# Altium PCB PTW_ECU_CP_V1.0.PcbDoc
Units mm, origin at the board's own origin, x right, y up, seen from the top; angles counter-clockwise.
Board outline 16 x 29.3 mm, 2 copper layers (Top Layer, Bottom Layer), stack 0.771 mm thick; 29 components, 21 nets, 105 pads, 148 vias.
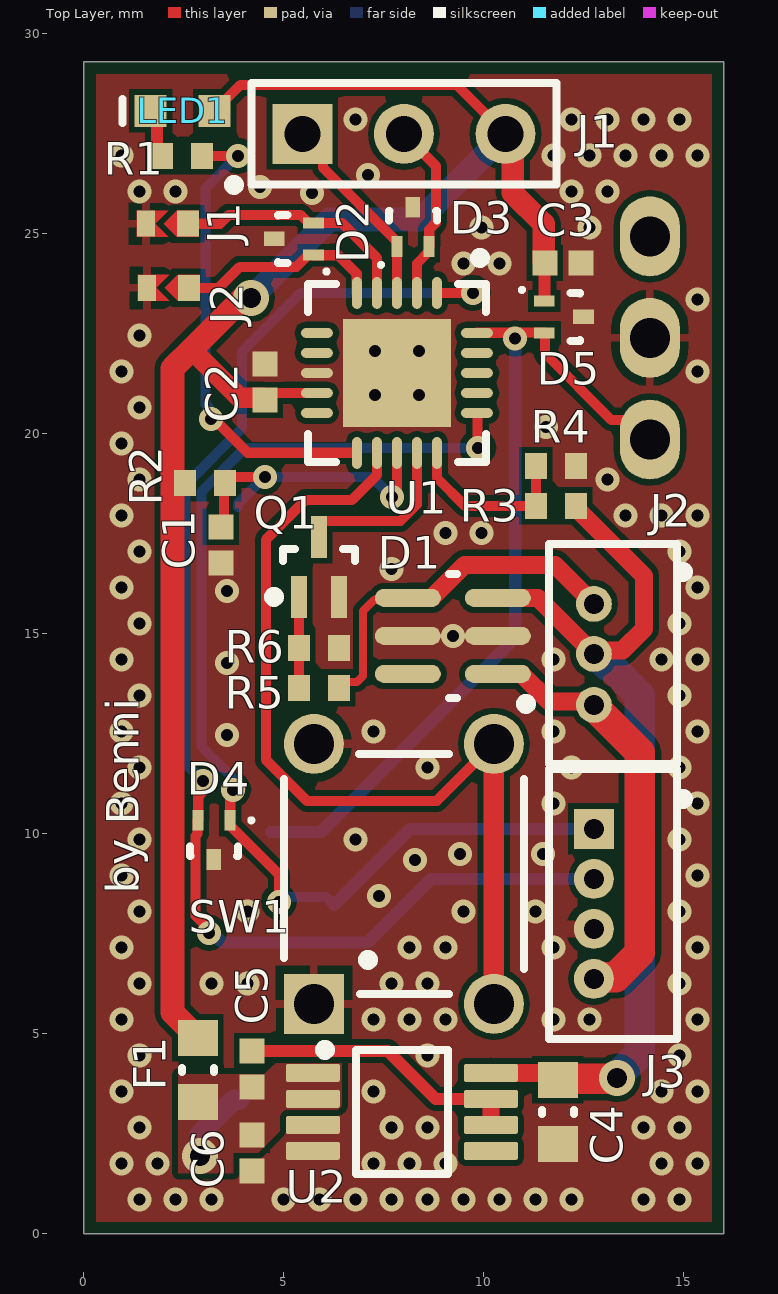
[diagram p0: Top Layer view]
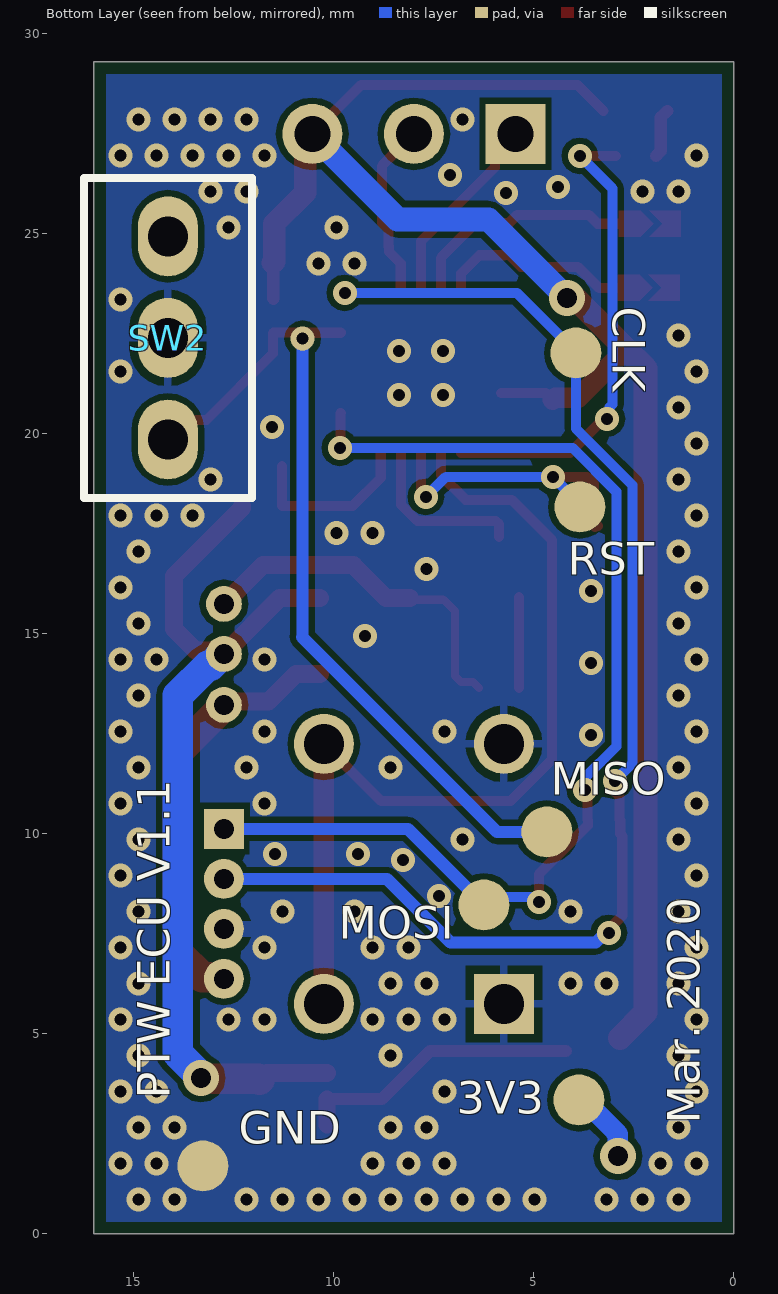
[diagram p1: Bottom Layer view, seen from below]

## Layer stack, top to bottom
Top Solder: solder mask 0.0102, Solder Resist, Dk 3.5
Top Layer: signal copper 0.0356
Dielectric 1: dielectric 0.7, FR-4, Dk 4.8
Bottom Layer: signal copper 0.0356
Bottom Solder: solder mask 0.0102, Solder Resist, Dk 3.5

## Board outline
0,0 16,0 16,29.3 0,29.3

## Design rules (kind name [scope] priority, off if disabled: settings)
BoardOutlineClearance [All] p1: gap=0.3 ignorepadtopadclearanceinfootprint=FALSE
Clearance [All] p1: gap=0.15 ignorepadtopadclearanceinfootprint=FALSE
ComponentClearance [All] p1: gap=0 collisioncheckmode=3 verticalgap=0 showdistances=FALSE
HoleSize [All] p1: absolutevalues=TRUE maxlimit=2.54 minlimit=0.3 maxpercent=80.000 minpercent=20.000
HoleToHoleClearance [All] p1: gap=0.45 allowstackedmicrovias=TRUE
MinimumSolderMaskSliver [All] p1: minsoldermaskwidth=0.051
PlaneConnect [All] p1: planeconnectstyle=Direct reliefexpansion=0.508 reliefentries=4 reliefconductorwidth=0.254 reliefairgap=0.254
PolygonConnect PolygonConnect_Jumper [InNet('GND') vs HasFootprint('Jmp0402(1005)_N')] p1: connectstyle=Relief reliefconductorwidth=0.203 reliefentries=4 polygonreliefangle="90 Angle" airgapwidth=0.203
PolygonConnect PolygonConnect_SW1 [InNet('GND') vs HasFootprint('OMRON B3F-1006')] p2: connectstyle=Relief reliefconductorwidth=0.203 reliefentries=4 polygonreliefangle="90 Angle" airgapwidth=0.203
PolygonConnect PolygonConnect_J3 [InNet('GND') vs HasFootprint('530470410')] p3: connectstyle=Relief reliefconductorwidth=0.406 reliefentries=4 polygonreliefangle="90 Angle" airgapwidth=0.203
PolygonConnect PolygonConnect_SW2 [InNet('GND') vs HasFootprint('D2A-1120')] p4: connectstyle=Relief reliefconductorwidth=0.203 reliefentries=4 polygonreliefangle="90 Angle" airgapwidth=0.203
PolygonConnect [All] p5: connectstyle=Direct reliefconductorwidth=0.254 reliefentries=4 polygonreliefangle="90 Angle" airgapwidth=0.254
RoutingVias [All] p1: holewidth=0.3 width=0.6 viastyle="Through Hole" minholewidth=0.3 minwidth=0.6 maxholewidth=5.08 maxwidth=63.5
SilkToSilkClearance [All] p1: silktosilkclearance=0.076
SilkToSolderMaskClearance [IsPad] p1: minsilkscreentomaskgap=0.051 clearancetoexposedcopper=TRUE
SolderMaskExpansion [All] p1: expansion=0.051
Width [All] p1: maxlimit=1.524 minlimit=0.15 preferedwidth=0.254
23 further rules are at their usual default settings.

## Classes and differential pairs
component class uC: C1 C2 C3 C4 C5 D1 D2 D3 D4 D5 F1 J1 J2 J3 LED1 Q1 R1 R2 R3 R4 R5 R6 SW1 SW2 U1 U2

## Components (designator, comment, footprint, x,y, rotation, side; value= is the part's Value field where it differs from the comment)
C1 "100nF 25V 0402" CAPC0402(1005)60_N 3.425,17.225 r90 top value=10nF
C2 "100nF 25V 0402" CAPC0402(1005)60_N 4.525,21.3 r270 top value=10nF
C3 "100nF 25V 0402" CAPC0402(1005)60_N 11.975,24.275 r180 top value=10nF
C4 "CAP 4.7µF 25V 0603" CAPC0603(1608)100_N 11.85,3.05 r90 top value=180pF
C5 "680pF 25V 0402" CAPC0402(1005)60_N 4.2,4.125 r270 top value=10nF
C6 "CAP 4.7µF 6.3V 0402" CAPC0402(1005)60_N 4.2,2.025 r90 top value=10nF
D1 "PESD24VS4UD,115" NXP-SOT457_N 9.225,14.95 r180 top
D2 "UESD3.3DT5G" ONSC-SOT-723-3-631AA-01_V 5.25,24.875 r180 top
D3 "UESD3.3DT5G" ONSC-SOT-723-3-631AA-01_V 8.225,25.175 r90 top
D4 "UESD3.3DT5G" ONSC-SOT-723-3-631AA-01_V 3.25,9.85 r270 top
D5 "UESD3.3DT5G" ONSC-SOT-723-3-631AA-01_V 12,22.925 r0 top
F1 "0ZCM0008FF2G" RESC0603(1608)_N 2.85,4.1 r90 top value="232.00 Ohm"
J1 "Jmp0402" Jmp0402(1005)_N 2.1,25.254 r180 top
J1 "801-43-003-10-001000" 801-43-003-10-001000 5.46,27.5 r0 top locked
J2 "Jmp0402" Jmp0402(1005)_N 2.125,23.65 r180 top
J2 "0530470310" 530470310 13.225,14.5 r90 top locked
J3 "0530470410" 530470410 12.75,8.25 r90 top locked
LED1 "150060SS75000" 0603_A 2.467,28.075 r0 top
Q1 "2N7002BKT,115" NXP-SOT416_B_N 5.875,16.675 r90 top
R1 "10k 1% 0402" RESC0402(1005)_N 2.45,26.95 r0 top value="10000.00 Ohm"
R2 "10k 1% 0402" RESC0402(1005)_N 3.025,18.775 r0 top value="10000.00 Ohm"
R3 "590k 0.1% 0402" RESC0402(1005)_N 11.8,18.2 r0 top value="470.00 Ohm"
R4 "110k 0.1% 0402" RESC0402(1005)_N 11.8,19.2 r180 top value="470.00 Ohm"
R5 "3k 1% 0402" RESC0402(1005)_N 5.875,13.65 r0 top value="470.00 Ohm"
R6 "10k 1% 0402" RESC0402(1005)_N 5.875,14.65 r180 top value="470.00 Ohm"
SW1 "B3F-1006" "OMRON B3F-1006" 8,9 r90 top locked
SW2 "D2A-1120" D2A-1120 14.15,22.4 r90 bottom locked
U1 "ATtiny84A-MUR" 20M1_N 7.825,21.525 r270 top
U2 "LP2951ACMM-3.3" DGK0008A_N 7.95,3.05 r0 top

## Footprints (in the part's own frame and the unit in brackets; to place one, negate y for a bottom-side part, rotate by r counter-clockwise, add the part's x,y. Pads: shape width x height; smd on the part's side, far side on the other; paste and mask are expansions set on the pad)
20M1_N [mm] "QFN, 20-Leads, Body 4x4mm, Pitch 0.5mm, Thermal Pad 2.7x2.7mm, IPC Medium Density"
  oval 0.8x0.25 smd: 1(-2,1) 2(-2,0.5) 3(-2,0) 4(-2,-0.5) 5(-2,-1) 11(2,-1) 12(2,-0.5) 13(2,0) 14(2,0.5) 15(2,1)
  oval 0.25x0.8 smd: 6(-1,-2) 7(-0.5,-2) 8(0,-2) 9(0.5,-2) 10(1,-2) 16(1,2) 17(0.5,2) 18(0,2) 19(-0.5,2) 20(-1,2)
  rect 2.7x2.7 smd: 21(0,0)
  silkscreen extent -3,-2.22 2.23,2.23, body extent -2.07,-2.07 2.08,2.08, height 0.8
0603_A [mm] "Chip LED, 2-Leads, Body 1.6x0.8mm, IPC Medium Density"
  rect 0.8x0.8 smd: 1(-0.8,0) 2(0.8,0)
  silkscreen extent -1.5,-0.3 -1.5,0.3, body extent -0.8,-0.4 0.8,0.4, height 0.7
801-43-003-10-001000 [mm] "Connector; Header; 3 Position"
  rect 1.5x1.5 hole 0.9 paste+0.051: 1(0,0)
  round 1.5 hole 0.9 paste+0.051: 2(2.54,0) 3(5.08,0)
  silkscreen extent -1.83,-1.4 6.35,1.27, body extent -1.31,-1.28 6.31,1.26, height 7.01
530470310 [mm] "CONN HEADER 3POS 1.25MM VERT TIN"
  round 0.9 hole 0.5 paste+0.051: 1(1.25,0.475) 2(0,0.475) 3(-1.275,0.475)
  silkscreen extent -2.75,-1.88 2.75,1.6, body extent -2.75,-1.6 2.75,1.6, height 4.25
530470410 [mm] "THD, 4-Leads, Body 5.5x3.2mm, Pitch 1.25mm"
  rect 1x1 hole 0.5 paste+0.051: 1(1.875,0)
  round 1 hole 0.5 paste+0.051: 2(0.625,0) 3(-0.625,0) 4(-1.875,0)
  silkscreen extent -3.37,-2.35 3.38,1.12, body extent -3.37,-2.07 3.38,1.13, height 4.18
CAPC0402(1005)60_N [mm] "Chip Capacitor, Body 1.0x0.5mm, Height 0.6mm, IPC Medium Density"
  rect 0.62x0.62 smd: 1(-0.45,0) 2(0.45,0)
  body extent -0.55,-0.3 0.55,0.3, height 0.6
CAPC0603(1608)100_N [mm] "Chip Capacitor, Body 1.6x0.8mm, Height 1.0mm, IPC Medium Density"
  rect 0.9x1 smd: 1(-0.8,0) 2(0.8,0)
  silkscreen extent -0.05,-0.4 0.05,0.4, body extent -0.87,-0.48 0.88,0.47, height 1
D2A-1120 [mm] "THT tactile switch"
  oval 2x1.5 hole 1 paste+0.051: 1(0,0) 2(2.54,0) 3(-2.54,0)
  silkscreen extent -4,-2.1 4,2.1, body extent -3.99,-2.8 7.01,2.8, height 8
DGK0008A_N [mm] "TSOP, 8-Leads, Body 3.1x3.1mm, Pitch 0.65mm, IPC Medium Density"
  rrect22% 1.35x0.45 smd paste+0.051 mask+0.051: 1(-2.225,0.975) 2(-2.225,0.325) 3(-2.225,-0.325) 4(-2.225,-0.975) 5(2.225,-0.975) 6(2.225,-0.325) 7(2.225,0.325) 8(2.225,0.975)
  silkscreen extent -2.05,-1.55 1.15,1.67, body extent -2.45,-1.5 2.45,1.5, height 0.94
Jmp0402(1005)_N [mm] "Jumper, Body 1.0x0.5mm, IPC Medium Density"
  rect 0.55x0.65 smd paste-1: 1(-0.5,0)
  rect 0.45x0.65 smd paste-1: 2(0.55,0)
  Top Layer region: 0.312,0 -0.013,-0.325 0.775,-0.325 0.775,0.325 -0.013,0.325
  Top Layer region: -0.775,-0.325 -0.225,-0.325 0.1,0 -0.225,0.325 -0.775,0.325
  Top Layer region: -0.062,-0.162
  Top Layer region: -0.225,-0.325
NXP-SOT416_B_N [mm] "SOT23, 3-Leads, Body 1.6x0.8mm, Pitch 0.5mm, IPC Medium Density"
  rect 1.05x0.4 smd paste+0.051: 1(-0.75,0.5) 2(-0.75,-0.5) 3(0.75,0)
  silkscreen extent -0.87,-0.9 0.45,1.25, body extent -0.45,-0.9 0.45,0.9, height 0.95
NXP-SOT457_N [mm] "SOP, 6-Leads, Body 3.1x1.7mm, Pitch 0.95mm, IPC Medium Density"
  oval 1.65x0.45 smd: 1(-1.125,0.95) 2(-1.125,0) 3(-1.125,-0.95) 4(1.125,-0.95) 5(1.125,0) 6(1.125,0.95)
  Top Layer region: -1.651,0
  silkscreen extent -1.95,-1.55 0.1,1.82, body extent -1.38,-1.5 1.39,1.5, height 0.94
"OMRON B3F-1006" [mm] "TH, 4-Leads, Body 6x6mm"
  rect 1.5x1.5 hole 1 paste+0.051: 1(-3.25,2.25)
  round 1.5 hole 1 paste+0.051: 2(3.25,2.25) 3(-3.25,-2.25) 4(3.25,-2.25)
  silkscreen extent -3,-3 3,3, body extent -3.85,-3 3.85,3, height 4.3
ONSC-SOT-723-3-631AA-01_V [mm] "SOT223, 3-Leads, Body 1.2x0.8mm, Pitch 0.4mm"
  rect 0.52x0.27 smd: 1(-0.49,0.4) 2(-0.49,-0.4)
  rect 0.52x0.36 smd: 3(0.49,0)
  silkscreen extent -0.86,-0.6 0.4,0.87, body extent -0.4,-0.6 0.4,0.6, height 0.55
RESC0402(1005)_N [mm] "Chip Resistor, Body 1.0x0.5mm, IPC Medium Density"
  rect 0.55x0.65 smd: 1(-0.5,0) 2(0.5,0)
  body extent -0.52,-0.27 0.53,0.28, height 0.4
RESC0603(1608)_N [mm] "Chip Resistor, Body 1.6x0.8mm, IPC Medium Density"
  rect 0.9x1 smd: 1(-0.8,0) 2(0.8,0)
  silkscreen extent -0.05,-0.4 0.05,0.4, body extent -0.85,-0.47 0.85,0.47, height 0.6

## Part data
C1 C2 C3: library part CMP-1034-01880-1, "CAP 100nF 25V ±10% 0402 (1005 Metric) Thickness 0.6mm SMD", Case-EIA=0402, Case-Metric=1005, Rated Voltage="25 V", Tolerance=±10%, Max Thickness="0.6 mm", Technology=SMT
C4: library part CMP-1035-01407-1, "CAP 4.7µF 25V ±2% 0603 (1608 Metric) Thickness 1mm SMD", Case-EIA=0603, Case-Metric=1608, Rated Voltage="16 V", Tolerance=±2%, Max Thickness="1 mm", Technology=SMT
C5: library part CMP-1034-01880-1, "CAP 680pF 25V ±10% 0402 (1005 Metric) Thickness 0.6mm SMD", Case-EIA=0402, Case-Metric=1005, Rated Voltage="25 V", Tolerance=±10%, Max Thickness="0.6 mm", Technology=SMT
C6: library part CMP-1034-01880-1, "CAP 4.7µF 6.3V ±10% 0402 (1005 Metric) Thickness 0.6mm SMD", Case-EIA=0402, Case-Metric=1005, Rated Voltage="25 V", Tolerance=±10%, Max Thickness="0.6 mm", Technology=SMT
D1: "TVS Diodes / ESD Suppressors 24V - 4-fold unidirectional ESD protection array"
D2 D3 D4 D5: library part CMP-1063-00209-1, "ESD Protection Diode, 3-Pin SOT-723, Pb-Free, Tape and Reel", Manufacturer="On Semiconductor", ComponentLink1Description="Manufacturer URL", ComponentLink1URL=http://www.onsemi.com/, ComponentLink2Description=Datasheet, ComponentLink2URL=http://www.onsemi.cn/pub_link/Collateral/UESD3.3DT5G-D.PDF, ComponentLink3Description="Package Specification", ComponentLink3URL=http://www.onsemi.com/pub_link/Collateral/631AA.PDF, DatasheetVersion="Rev. 4", Direction=Unidirectional, IR Max (uA)=1, Mounting Technology="Surface Mount", Number of Lines=2, PackageDescription="3-Pin Small Outline Transistor, Body 1.2 x 0.8 mm, Pitch 0.4 mm", PackageReference=SOT-723-3-631AA-01, PackageVersion="Rev. D, 08/2009", Packing="Tape and Reel", PartNumber=UESD3.3DT5G, RoHS=Pb-Free, V(BR) Min (V)=5, VRWM Max (V)=3.3
F1: library part CMP-1012-00436-1, "PTC 80mA 15V 0603 Trip: 200mA", Case-EIA=0603, Case-Metric=1608, Power="0.1 W", Tolerance="1 %", Technology=SMT
J1 J2: "Jumper 0402 with 150µm space"
J1: "3 Pim header socket 7mm height", ComponentLink1Description=Datasheet, ComponentLink1URL=https://www.mill-max.com/products/socket/801-xx-xxx-10-001000/801-43-003-10-001000?s_term=801-43-003-10-001000&s_type=Quick%2FProduct%2FPart+Number+Search
J2: "Molex Picoblade, 3Pin THT Straight", Supplier Part Number 1=538-53047-0310, ComponentLink1Description=Datasheet, ComponentLink1URL=http://www.molex.com/pdm_docs/sd/530470310_sd.pdf, Supplier 1=Mouser, Supplier 2=Digi-Key, Supplier Part Number 2=WM1732-ND
J3: "Molex Picoblade, 4Pin THT Straight", ComponentLink1Description=Datasheet, ComponentLink1URL=http://www.molex.com/pdm_docs/sd/530470410_sd.pdf
LED1: library part CMP-1426-00004-1, "SMD mono-color Chip LED, WL-SMCW, Super Red", Color="Super Red", Manufacturer="Wuerth Elektronik", ComponentLink1Description="Manufacturer URL", ComponentLink1URL=http://www.we-online.com, ComponentLink2Description=Datasheet, ComponentLink2URL=http://katalog.we-online.com/led/datasheet/150060SS75000.pdf, PackageReference=0603_A, PartNumber=150060SS75000
Q1: library part CMP-1259-00271-1, "N-Channel Trench MOSFET, 60 V, 0.29 A, -55 to 150 degC, 3-Pin SOT416, Tape and Reel", Manufacturer="NXP Semiconductors", Automotive Qualified=Y, Channel Type=N, Code_JEITA=SC-75, ComponentLink1Description="Manufacturer URL", ComponentLink1URL=http://www.nxp.com/, ComponentLink2Description=Datasheet, ComponentLink2URL=http://www.nxp.com/documents/data_sheet/2N7002BKT.pdf, ComponentLink3Description="Package Specification", ComponentLink3URL=http://www.nxp.com/documents/data_sheet/2N7002PT.pdf, DatasheetVersion="Rev. 1", ID [max] (A)=0.29, IDM [max] (A)=1.2, Mounting Technology="Surface Mount", PackageDescription="3-Pin Small Outline Transistor Package, Body 1.6 x 0.8 mm, Pitch 0.5 mm", PackageReference=SOT416_B, PackageVersion="06-03-16, 03/2006", Packing="Tape & Reel", PartNumber=2N7002BKT,115, VDS [max] (V)=60, VGSth [typ] (V)=1.6
R1 R2: library part CMP-1011-00623-1, "10K 0.063W 1% 0402 (1005 Metric)  SMD", Case-EIA=0402, Case-Metric=1005, Power="0.063 W", Tolerance="1 %", Technology=SMT
R3: library part CMP-1011-00473-1, "590k 0.063W 1% 0402 (1005 Metric)  SMD", Case-EIA=0402, Case-Metric=1005, Power="0.063 W", Tolerance="1 %", Technology=SMT
R4: library part CMP-1011-00473-1, "110k 0.063W 1% 0402 (1005 Metric)  SMD", Case-EIA=0402, Case-Metric=1005, Power="0.063 W", Tolerance="1 %", Technology=SMT
R5: library part CMP-1011-00473-1, "3k 0.063W 1% 0402 (1005 Metric)  SMD", Case-EIA=0402, Case-Metric=1005, Power="0.063 W", Tolerance="1 %", Technology=SMT
R6: library part CMP-1011-00473-1, "10k 0.063W 1% 0402 (1005 Metric)  SMD", Case-EIA=0402, Case-Metric=1005, Power="0.063 W", Tolerance="1 %", Technology=SMT
SW1: "Tactile Switch Omron B3F-1006", Contact Resistance=50mOhm, ComponentLink1Description=Datasheet, ComponentLink1URL=https://omronfs.omron.com/en_US/ecb/products/pdf/en-b3f.pdf, Manufacture specification=B3F-1006, Travel=0.25mm
SW2: "SWITCH TACTILE Omron D2A 0.1A 30V", Contact resistence="50mO max.", Current Rating="0.1A @ 30VDC", Manufacturer=Omron, Manufacturer Part=MK-12C02-PB, Operating force=50gf±1gf, Operating Temperature="-10°C ~ 80°C", Actuator Type=Standard, ComponentLink1Description="Manufacturer URL", ComponentLink1URL=http://components.omron.eu/, ComponentLink2Description=Datasheet, ComponentLink2URL=https://omronfs.omron.com/en_US/ecb/products/pdf/en-d2a.pdf, Insulation="100MO min.", Mounting Type="Through Hole", Switch Function=On-On
U1: library part CMP-0093-00271-1, "8-bit AVR Microcontroller,  20MHz, 1.8-5.5V, 8KB Flash, 512 Bytes EEPROM, 512 Bytes SRAM, 20-pin MLF, Industrial Grade (-40°C to 85°C), Pb-Free, Reel", Code_JEDEC=MO-220WGGD-5, ComponentLink1Description="Manufacturer URL", ComponentLink1URL=http://www.atmel.com/, ComponentLink2Description="ATtiny24A/44A/84A Datasheet", ComponentLink2URL=http://www.atmel.com/dyn/resources/prod_documents/doc8183.pdf, ComponentLink3Description="ATtiny24A/44A/84A Summary", ComponentLink3URL=http://www.atmel.com/dyn/resources/prod_documents/8183S.pdf, DatasheetVersion="revD, Apr-2011", PackageDescription="20-pad, 4 x 4 x 0.8 mm Body, Lead Pitch 0.50 mm, 2.6 mm Exposed Pad, Micro Lead Frame Package (MLF)", PackageReference=20M1, PackageVersion="revA, Oct-2004", PartId=1
U2: library part CMP-0062-02229-3, "Series of Adjustable Micropower Voltage Regulators, 8-pin Mini SOIC", Manufacturer="Texas Instruments", PackageTopMarking=ZXTT*L0CA, PowerWise=N, Code_JEDEC=MO-187-AA, ComponentLink1Description="Datasheet URL", ComponentLink1URL=http://www.ti.com/general/docs/lit/getliterature.tsp?genericPartNumber=LP2951-N&fileType=pdf, CompType="LDO IC", PackageDescription="MINI SOIC, .118 x .118 x .034in, 8 Lead, .0256in Pitch", PackageReference=DGK0008A, PinCount=8, RoHS=N

## Free pads (board coordinates)
  round 1.27 smd far side paste+0.051: 2(3.85,18.175) 2(3.875,3.35) 2(3.95,22.025) 2(4.675,10.05) 2(6.25,8.225) 2(13.275,1.7)

## Via types
v1: diameter 0.6, hole 0.3, Top Layer to Bottom Layer, tented both sides, 145 vias
v2: diameter 0.9, hole 0.5, Top Layer to Bottom Layer, tented both sides, 3 vias

## Nets (pads, with @x,y where several pads share a name; then routed paths per layer and width w, separated by ;. In a path a pad name is that pad's centre, name@x,y a point inside that pad or via, vN(x,y) a via of type N, cw(c..) or ccw(c..) an arc to the next point about the centre after c; other vN are vias at no path point)
3V3: C5.2 C6.2 F1.1 pad.2@3.875,3.35 U2.1 U2.2 | length 1.9
  Bottom Layer w0.508: v2(2.9,1.95) 2.9,2.498 3.102,2.7 3.752,3.35 pad.2@3.875,3.35
21V: C4.2 D1.3 J2.2@12.75,14.5 R3.2 U2.8 | length 22.9
  Top Layer w0.457: U2.8 10.179,4.021 11.679,4.021 C4.2 ; D1.3 10.354,15.896 11.354,15.896 12.75,14.5 12.835,14.585 13.46,14.585 14,15.125 14,16.45 12.3,18.15 R3.2
  Top Layer w0.762: C4.2 11.875,3.875 13.3,3.875 v2(13.325,3.9)
  Bottom Layer w0.762: J2.2@12.75,14.5 12.787,14.5 13.081,14.206 13.156,14.206 13.9,13.462 13.9,4.512 13.325,3.937 v2(13.325,3.9)
Auto_Jumper: D2.1 J2.1@2.625,23.65 U1.5 | length 5.2
  Top Layer w0.254: J2.1@2.625,23.65 3.375,23.65 3.9,24.175 5.315,24.175 5.615,24.475 D2.1 5.748,24.467 6.358,24.467 6.823,24.002 6.823,23.527 U1.5
Battery: R3.1 R4.2 U1.15 | length 4.4
  Top Layer w0.254: U1.15 8.827,19.523 8.827,18.898 9.525,18.2 R3.1 R4.2
FA_signal: D1.4 J2.1@12.75,15.75 R5.2 | length 9
  Top Layer w0.203: R5.2 6.525,13.8 6.823,13.8 6.975,13.952 6.975,15.575 7.25,15.85 7.275,15.85 7.278,15.853 8.053,15.853 D1.4
  Top Layer w0.457: D1.4 8.693,15.9 9.518,16.725 11.775,16.725 J2.1@12.75,15.75
FA_signal_µC: Q1.3 U1.14 | length 4.3
  Top Layer w0.254: Q1.3 5.875,17.75 5.948,17.823 7.914,17.823 8.325,18.234 U1.14
GND: C1.1 C2.1 C3.1 C4.1 C6.1 D1.2 D1.5 D2.3 D3.3 D4.3 D5.3 J1.2@1.55,25.254 J2.2@1.575,23.65 J3.3 pad.2@13.275,1.7 Q1.2 R4.1 R6.1 SW1.1 SW1.2 SW2.1 U1.8 U1.21 U2.3 U2.4
  other v1: 1.39,0.86 2.29,0.86 3.19,0.86 4.99,0.86 5.89,0.86 6.79,0.86 7.69,0.86 8.59,0.86 9.49,0.86 10.39,0.86 11.29,0.86 12.19,0.86 13.99,0.86 14.89,0.86 0.94,1.76 1.84,1.76 7.24,1.76 8.14,1.76 9.04,1.76 14.44,1.76 15.34,1.76 1.39,2.66 7.69,2.66 8.59,2.66 13.99,2.66 14.89,2.66 0.94,3.56 7.24,3.56 14.44,3.56 15.34,3.56 1.39,4.46 8.59,4.46 14.89,4.46 0.94,5.36 7.24,5.36 8.14,5.36 9.04,5.36 11.74,5.36 12.64,5.36 15.34,5.36 1.39,6.26 3.19,6.26 4.09,6.26 7.69,6.26 8.59,6.26 14.89,6.26 0.94,7.16 8.14,7.16 9.04,7.16 11.74,7.16 15.34,7.16 1.39,8.06 4.09,8.06 9.49,8.06 11.29,8.06 14.89,8.06 7.376,8.45 0.94,8.96 15.34,8.96 8.275,9.35 9.4,9.5 11.475,9.5 1.39,9.86 6.79,9.86 14.89,9.86 0.94,10.76 11.74,10.76 15.34,10.76 1.39,11.66 8.59,11.66 12.19,11.66 14.89,11.66 3.575,12.475 0.94,12.56 7.24,12.56 11.74,12.56 15.34,12.56 1.39,13.46 14.89,13.46 3.575,14.275 0.94,14.36 11.74,14.36 14.44,14.36 15.34,14.36 9.225,14.95 1.39,15.26 14.89,15.26 3.575,16.075 0.94,16.16 15.34,16.16 7.69,16.625 1.39,17.06 14.89,17.06 9.04,17.525 9.94,17.525 0.94,17.96 13.54,17.96 14.44,17.96 15.34,17.96 1.39,18.86 13.09,18.86 0.94,19.76 11.55,20.175 1.39,20.66 7.275,20.975 8.375,20.975 0.94,21.56 15.34,21.56 7.275,22.075 8.375,22.075 1.39,22.46 15.34,23.36 9.49,24.26 10.39,24.26 9.94,25.16 12.64,25.16 5.7,26.025 1.39,26.06 2.29,26.06 12.19,26.06 13.09,26.06 4.4,26.175 7.1,26.475 0.94,26.96 11.74,26.96 12.64,26.96 13.54,26.96 14.44,26.96 15.34,26.96 6.79,27.86 12.19,27.86 13.09,27.86 13.99,27.86 14.89,27.86
LB_Input: D3.2 J1.2@8,27.5 U1.2 | length 4.5
  Top Layer w0.254: J1.2@8,27.5 8.8,26.7 8.8,25.275 8.633,25.108 8.633,24.693 D3.2 8.625,24.56 8.327,24.262 8.327,23.527 U1.2
LB_Out: D3.1 J1.1@5.46,27.5 U1.3 | length 4.9
  Top Layer w0.254: J1.1@5.46,27.5 5.975,26.985 5.975,26.66 7.825,24.81 D3.1 ; U1.3 D3.1@7.825,24.66
LED: R1.2 U1.11 | length 11.9
  Top Layer w0.254: R1.2 v1(3.85,26.95) ; v1(3.175,20.375) 3.25,20.375 4.098,19.527 6.823,19.527 U1.11
  Bottom Layer w0.254: v1(3.175,20.375) 3.109,20.441 3.109,20.667 3.038,20.738 3.038,26.138 v1(3.85,26.95)
"Mag_Detect / MISO": D5.2 pad.2@4.675,10.05 SW2.3 U1.20 | length 21.6
  Top Layer w0.254: U1.20 9.827,22.527 10.777,22.527 10.783,22.521 v1(10.783,22.382) 10.783,22.499 10.817,22.533 11.502,22.533 D5.2 11.518,22.525 11.526,22.517 11.526,22.009 13.187,20.348 13.662,20.348 SW2.3
  Bottom Layer w0.305: pad.2@4.675,10.05 5.925,10.05 10.8,14.925 10.783,14.942 v1(10.783,22.382)
"N-Fet / SDA / MOSI": D4.1 J3.1 pad.2@6.25,8.225 U1.16 | length 28.4
  Top Layer w0.254: v1(3.725,11.101) v1@3.892,11.101 ; v1@3.912,11.119 3.893,11.1 3.658,10.865 3.658,10.348 D4.1 3.65,10.215 4.875,8.99 v1(4.875,8.3) ; U1.16 9.835,20.525 9.837,20.523 9.837,19.663 v1(9.85,19.65)
  Bottom Layer w0.254: v1(3.725,11.101) 3.725,11.4 2.938,12.187 2.938,18.553 4.035,19.65 v1(9.85,19.65) ; v1(4.875,8.3) 4.994,8.419 6.056,8.419 pad.2@6.25,8.225
  Bottom Layer w0.305: pad.2@6.25,8.225 8.15,10.125 J3.1
NetC5_1: C5.1 U2.6 U2.7 | length 7.1
  Top Layer w0.305: C5.1 7.596,4.575 8.796,3.375 U2.7
  Top Layer w0.432: U2.6 U2.7
NetLED1_1: LED1.1 R1.1 | length 1.2
  Top Layer w0.305: LED1.1 1.827,27.915 1.827,27.073 R1.1
NetQ1_1: Q1.1 R5.1 R6.2 | length 2.3
  Top Layer w0.254: R5.1 R6.2 Q1.1
"P-Fet / SCL / SCK": D4.2 J3.2 pad.2@3.95,22.025 U1.1 | length 33.4
  Top Layer w0.254: v1(2.975,11.326) 3.124,11.326 2.965,11.166 3.025,11.106 2.858,10.939 2.858,10.348 D4.2 2.842,10.332 2.842,10 2.793,9.951 2.793,7.951 3.125,7.619 v1(3.125,7.525) ; U1.1 v1(9.725,23.525)
  Bottom Layer w0.254: v1(2.975,11.326) 2.534,11.767 2.534,18.72 3.95,20.136 3.95,22.05 5.425,23.525 v1(9.725,23.525) ; v1(3.125,7.525) v1@3.219,7.525
  Bottom Layer w0.305: v1@3.219,7.525 3.431,7.313 3.456,7.288 7.088,7.288 8.675,8.875 J3.2
RESET: C1.2 pad.2@3.85,18.175 R2.2 U1.13 | length 7.7
  Top Layer w0.254: C1.2@3.4,17.7 C1.2@3.437,17.738 ; C1.2@3.475,17.675 3.5,17.7 3.5,18.75 R2.2 3.525,18.777 3.673,18.925 v1@4.431,18.925 ; v1(7.7,18.425) 7.7,18.519 7.825,18.644 U1.13
  Bottom Layer w0.254: pad.2@3.85,18.175 3.85,18.25 v1(4.525,18.925) 7.2,18.925 v1(7.7,18.425)
Semi_Jumper: D2.2 J1.1@2.6,25.254 U1.4 | length 6.1
  Top Layer w0.254: J1.1@2.6,25.254 3.404,25.254 3.625,25.475 5.415,25.475 5.615,25.275 D2.2 6.45,25.275 7.325,24.4 U1.4
Trigger_Signal: SW1.3 SW1.4 U1.12 | length 22.7
  Top Layer w0.254: U1.12 7.325,18.97 6.705,18.35 5.55,18.35 4.55,17.35 4.55,11.85 5.575,10.825 8.825,10.825 SW1.4
  Top Layer w0.508: SW1.3 SW1.4
Unregulated_input: D1.1 J2.3 J3.4 | length 10.9
  Top Layer w0.457: D1.1 10.943,14 11.633,13.31 12.665,13.31 J2.3
  Top Layer w0.762: J2.3 12.75,13.188 13.9,12.038 13.9,7.025 13.296,6.421 12.796,6.421 J3.4 J3.4@12.814,6.375
VCC: C2.2 C3.2 D5.1 F1.2 J1.3 LED1.2 R2.1 U1.9 | length 44.1
  Top Layer w0.254: LED1.2 3.917,28.725 9.315,28.725 J1.3 ; C2.2 4.698,21.023 5.823,21.023 U1.9
  Top Layer w0.305: D5.1@11.51,23.375 11.518,23.382 11.518,24.267 C3.2
  Top Layer w0.508: 2.688,22.112 3.894,20.906 4.469,20.906 C2.2
  Top Layer w0.559: J1.3 10.72,27.32 10.72,26.028 11.494,25.254 11.494,24.306 C3.2
  Top Layer w0.6: F1.2 2.216,5.534 2.216,10.888 2.215,10.889 2.215,11.511 2.216,11.512 2.216,21.641 2.688,22.112 3.975,23.4 v2(4.175,23.4)
  Bottom Layer w0.6: v2(4.175,23.4) 6.139,25.364 8.404,25.364 J1.3
pads on no net: D1.6 SW2.2 U1.6 U1.7 U1.10 U1.17 U1.18 U1.19 U2.5

## Polygon pours and split planes (outlines as drawn)
GND on Top Layer "TopGND" (solid, remove dead copper, pour order 7): 0,0 16,0 16,29.3 0,29.3
3V3 on Top Layer "Top3V3" (solid, remove dead copper, pour order 5): 6.45,3.1 6.45,4.3 4.825,4.3 4.5,3.975 4.488,3.987 2.363,3.987 2.363,1.517 3.842,1.517 5.425,3.1
GND on Bottom Layer "BotGND" (solid, remove dead copper, pour order 9): 0,0 16,0 16,29.3 0,29.3

## Silkscreen, mask and mechanical layers (free items; w line width, h text height)
Top Overlay:
  text "by Benni" at 1.375,8.5 h0.81 r90
Bottom Overlay:
  text "CLK" at 3.025,23.175 h0.81 r90
  text "RST" at 4.15,16.475 h0.81
  text "MISO" at 4.575,10.975 h0.81
  text "MOSI" at 9.875,7.375 h0.81
  text "PTW ECU V1.1" at 14.1,3.375 h0.81 r270
  text "3V3" at 6.925,3 h0.81
  text "Mar. 2020" at 0.85,2.75 h0.81 r270
  text "GND" at 12.375,2.25 h0.81
Mechanical 1:
  the board outline again, w0.051